# Altium PCB WPT_PLL_Transmitter.PcbDoc
Units mil, origin at the board's own origin, x right, y up, seen from the top; angles counter-clockwise.
Board outline 2100 x 1700 mil, 2 copper layers (Top Layer, Bottom Layer); 14 components, 21 nets, 56 pads, 3 vias.
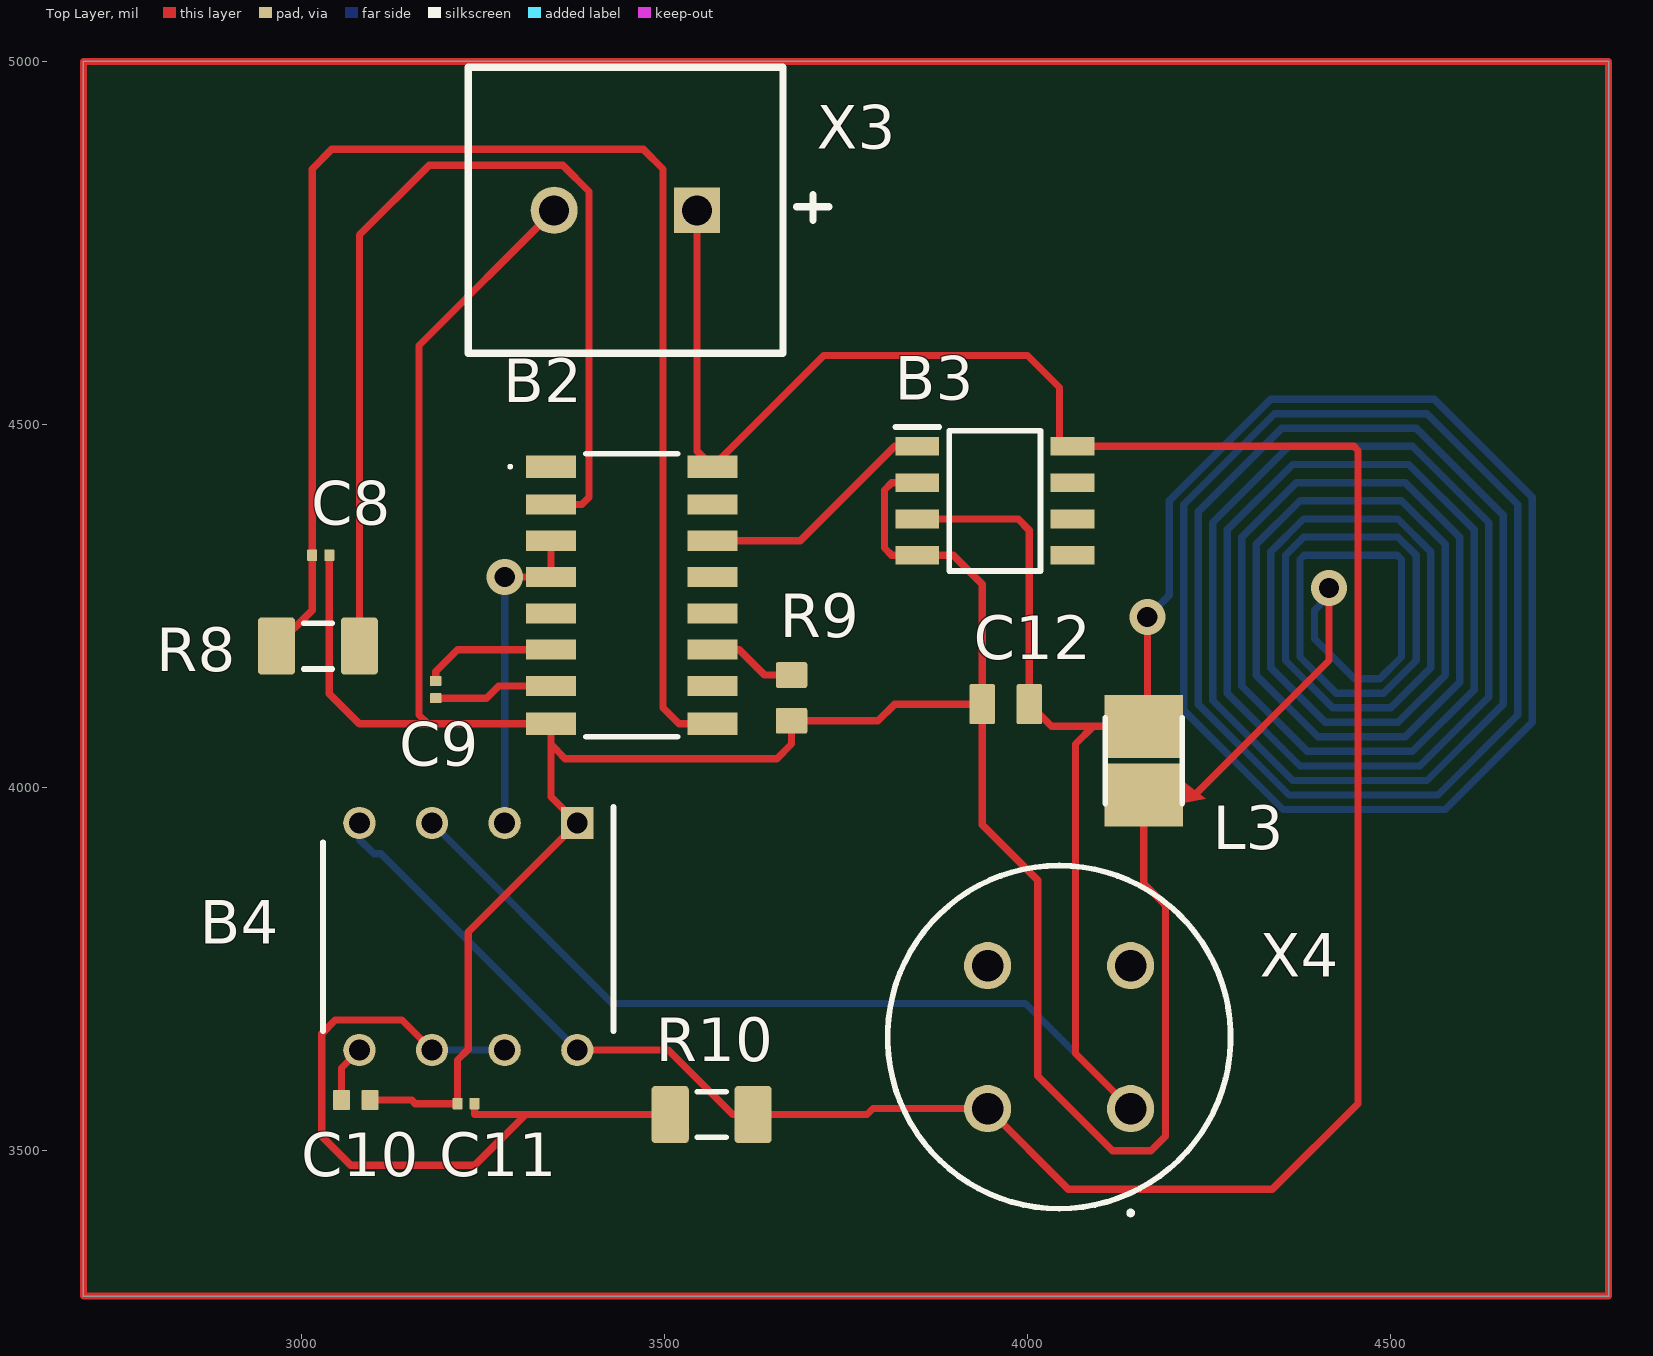
[diagram p0: Top Layer view]
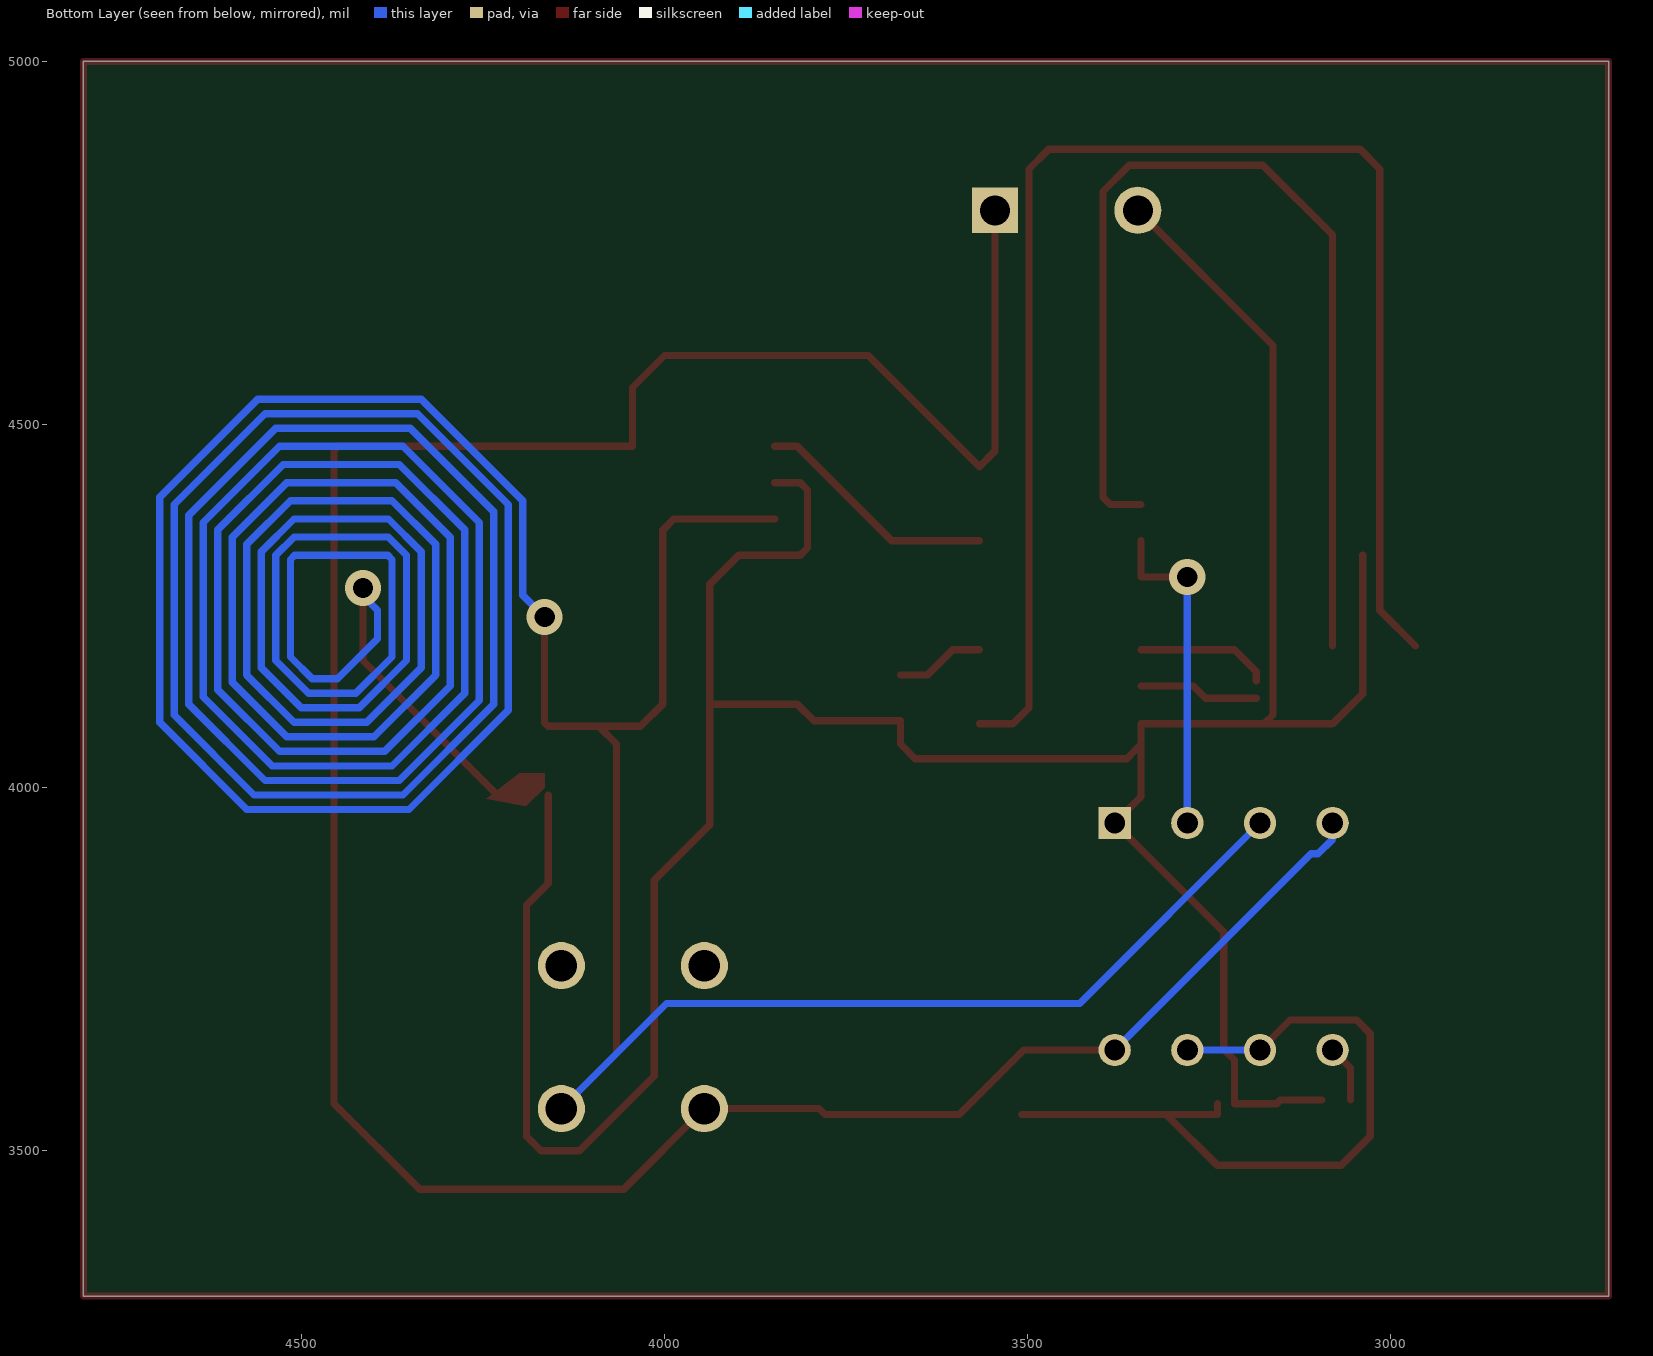
[diagram p1: Bottom Layer view, seen from below]
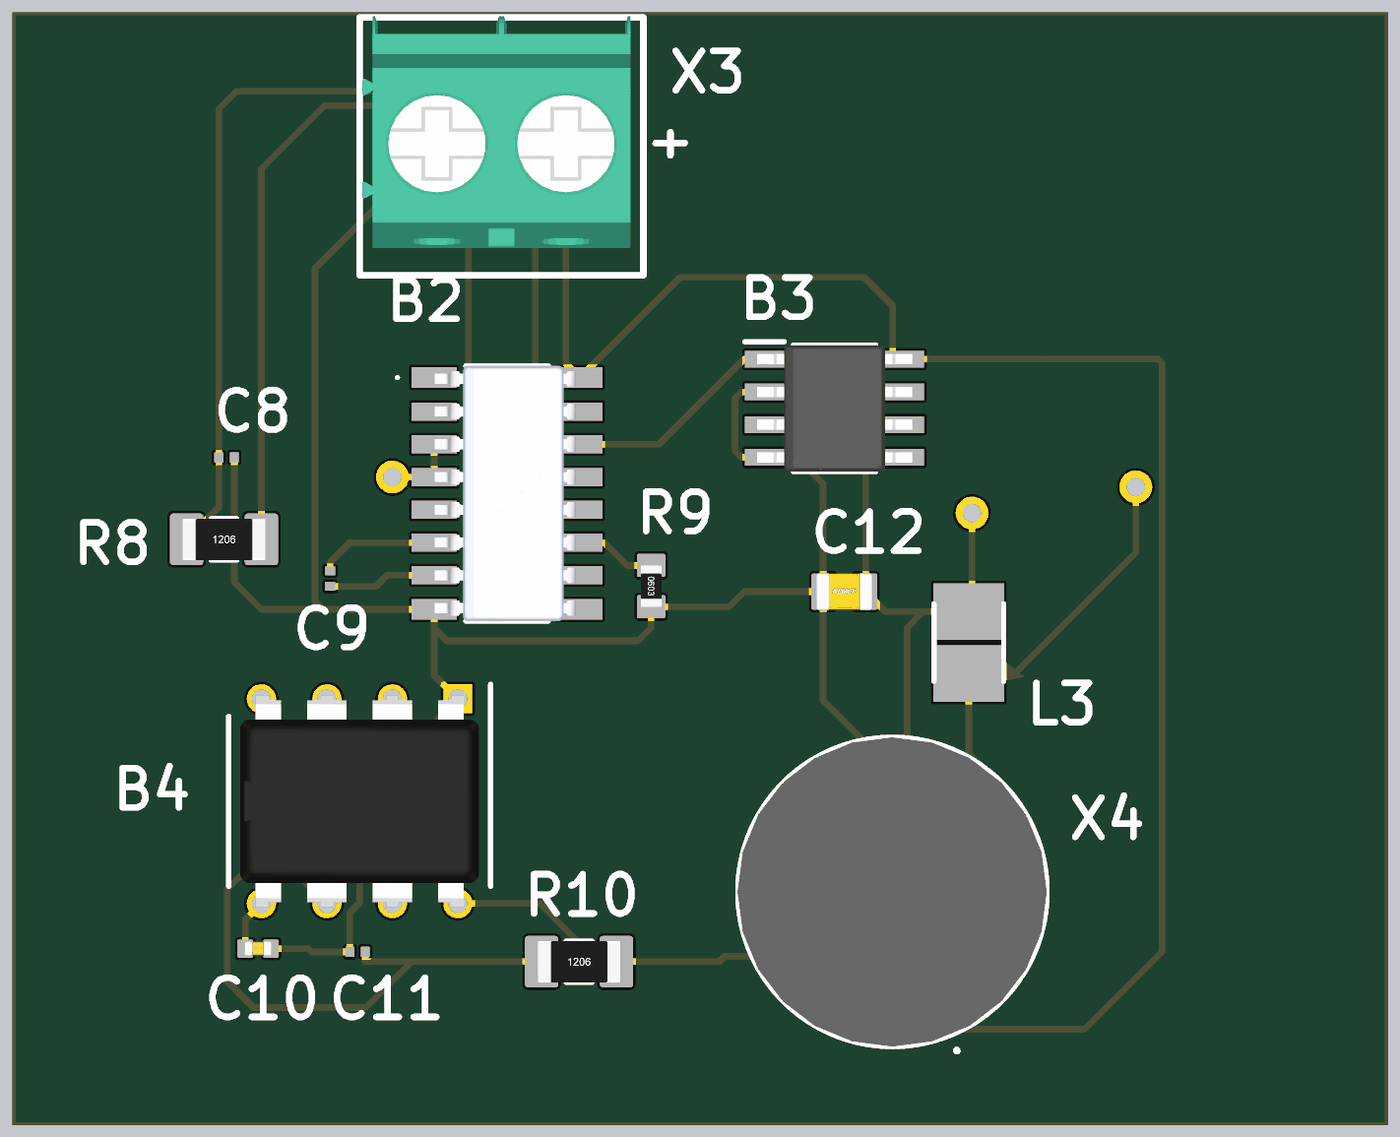
[diagram p2: 3D render of the assembled board from above, using the file's embedded part models]

## Layer stack, top to bottom
Top Solder: solder mask 0.4, Solder Resist, Dk 3.5
Top Layer: signal copper 1.4
Dielectric 1: dielectric 12.6, FR-4, Dk 4.8
Bottom Layer: signal copper 1.4
Bottom Solder: solder mask 0.4, Solder Resist, Dk 3.5

## Board outline
2700,3300 2700,5000 4800,5000 4800,3300

## Design rules (kind name [scope] priority, off if disabled: settings)
Clearance [All] p1: gap=10 ignorepadtopadclearanceinfootprint=FALSE except(0: Arc-Hole Track-Hole SMDPad-Hole THPad-Hole Via-Hole Fill-Hole Poly-Hole Region-Hole Text-Hole)
PolygonConnect [All] p1: connectstyle=Relief reliefconductorwidth=10 reliefentries=4 polygonreliefangle="90 Angle" airgapwidth=10
RoomDefinition WPT_PLL_Transmitter [InComponentClass('WPT_PLL_Transmitter')] p1: confinementstyle=ConfineIn formatcopy=TRUE lockcomponents=FALSE outline 6490,3010 5687.76,3010 5687.76,2210 6490,2210
RoutingVias [All] p1: holewidth=28 width=50 viastyle="Through Hole" minholewidth=28 minwidth=50 maxholewidth=28 maxwidth=50
SolderMaskExpansion [All] p1: expansion=4 istentingtop=FALSE
Width [All] p1: maxlimit=10 minlimit=10 preferedwidth=10
30 further rules are at their usual default settings.

## Classes and differential pairs
component class WPT_Transmitter: L1
component class WPT_.RecieverSchDoc: L2

## Components (designator, comment, footprint, x,y, rotation, side; value= is the part's Value field where it differs from the comment)
B2 "HEF4046BT_653" HEF4046BT653 3455,4265 r270 top
B3 "LM393DR" SOIC127P600X175-8N 3955,4395 r0 top
B4 "NE555P" DIP794W53P254L959H508Q8N 3230,3795 r270 top
C8 "CL03A104KQ3NNNC" CAP0201 3026.81,4320 r180 top value=0.1μF
C9 "GCM0335C1H101FA16D" CAP0201 3185,4135 r90 top value=100pF
C10 "KGM05AR71C103KH" CAP0402 3075,3570 r0 top value=0.01μF
C11 "GCM0335C1H101FA16D" CAP0201 3226.81,3565 r180 top value=100pF
C12 "CL21A106KOCLRNC" CAP0805 3970,4115 r0 top value=10μF
L3 "Custom Trace Inductor" "Custom Trace Inductor" 4160,4037.24 r90 top
R8 "RNCP1206FTD1K00" RES1206 3022.91,4195 r0 top value=1kΩ
R9 "RC0603FR-07100KL" RES0603 3675,4123.5 r270 top value=100kΩ
R10 "RNCP1206FTD1K00" RES1206 3565,3550 r0 top value=1kΩ
X3 "1934861" 1934861 3446.57,4795 r180 top
X4 "D6L90F1LFS" D6L90F1LFS 4141.85,3558.15 r90 top

## Footprints (in the part's own frame and the unit in brackets; to place one, negate y for a bottom-side part, rotate by r counter-clockwise, add the part's x,y. Pads: shape width x height; smd on the part's side, far side on the other; paste and mask are expansions set on the pad)
1934861 [mm]
  rect 1.6x1.6 hole 1.05 mask+0.05: 1(-2.5,0)
  round 1.65 hole 1.05 mask+0.05: 2(2.5,0)
  silkscreen extent -7.1,-5 5.5,5, body extent -5,-5.05 5.4,3.95, height 11.41
CAP0201 [mm] "Chip Capacitor, Body 0.6x0.3mm, Height 0.25mm, IPC Medium Density"
  rrect15% 0.35x0.4 smd: 1(-0.3,0) 2(0.3,0)
  body extent -0.3,-0.15 0.3,0.15, height 0.3
CAP0402 [mm] "Chip Capacitor, Body 1x0.5mm, Height 0.35mm, IPC Medium Density"
  rrect15% 0.6x0.7 smd: 1(-0.5,0) 2(0.5,0)
  body extent -0.53,-0.28 0.52,0.27, height 0.54
CAP0805 [mm] "Chip Capacitor, Body 2.0x1.2mm, Height 0.45mm, IPC Medium Density"
  rrect15% 0.9x1.4 smd: 1(-0.825,0) 2(0.825,0)
  body extent -1.1,-0.73 1.1,0.72, height 1.39
"Custom Trace Inductor" [mm]
  rect 2.2x2.75 smd: 1(-1.2,0) 2(1.2,0)
  silkscreen extent -1.5,-1.35 1.5,1.35
D6L90F1LFS [mm]
  round 1.65 hole 1.1: 1(0,0) 2(5,0) 3(5,5) 4(0,5)
  silkscreen extent -3.7,-3.5 8.5,8.5, body extent -3.5,-3.48 8.5,8.5, height 12.9
DIP794W53P254L959H508Q8N [mm]
  rect 1.13x1.13 / inner round 1.13 / far side rect 1.13x1.13 hole 0.73: 1(-3.97,3.81)
  round 1.13 hole 0.73: 2(-3.97,1.27) 3(-3.97,-1.27) 4(-3.97,-3.81) 5(3.97,-3.81) 6(3.97,-1.27) 7(3.97,1.27) 8(3.97,3.81)
  silkscreen extent -4.54,-5.08 3.3,5.08, body extent -4.1,-4.64 4.1,4.64, height 4.21
HEF4046BT653 [mm]
  rect 0.8x1.75 smd: 1(-4.495,-2.825) 8(4.495,-2.825) 9(4.495,2.825) 16(-4.495,2.825)
  rect 0.7x1.75 smd: 2(-3.175,-2.825) 3(-1.905,-2.825) 4(-0.635,-2.825) 5(0.635,-2.825) 6(1.905,-2.825) 7(3.175,-2.825) 10(3.175,2.825) 11(1.905,2.825) 12(0.635,2.825) 13(-0.635,2.825) 14(-1.905,2.825) 15(-3.175,2.825)
  silkscreen extent -4.95,-4.3 4.95,1.6, body extent -4.95,-2.82 4.95,3.27, height 1.56
RES0603 [mm] "Chip Resistor, Body 1.6x0.8mm, IPC Medium Density"
  rrect15% 0.9x1.1 smd: 1(-0.8,0) 2(0.8,0)
  body extent -0.8,-0.4 0.8,0.4, height 0.46
RES1206 [mm] "Chip Resistor, Body 3.2x1.6mm, IPC Medium Density"
  rrect20% 1.3x2 smd: 1(-1.45,0) 2(1.45,0)
  silkscreen extent -0.5,-0.8 0.5,0.8, body extent -1.6,-0.8 1.6,0.8, height 0.61
SOIC127P600X175-8N [mm]
  rect 1.528x0.65 smd: 1(-2.711,1.905) 2(-2.711,0.635) 3(-2.711,-0.635) 4(-2.711,-1.905) 5(2.711,-1.905) 6(2.711,-0.635) 7(2.711,0.635) 8(2.711,1.905)
  silkscreen extent -3.47,-2.45 1.6,2.58, body extent -3.01,-2.45 3.01,2.45, height 1.63

## Part data
B2: "HEF4046B - Phase-locked loop@en-us", Manufacturer_Name=Nexperia, Manufacturer_Part_Number=HEF4046BT,653, Mouser Part Number=771-HEF4046BTD-T, Datasheet Link=https://assets.nexperia.com/documents/data-sheet/HEF4046B.pdf, Geometry.Height=1.75mm, Mouser Price/Stock=https://www.mouser.co.uk/ProductDetail/Nexperia/HEF4046BT653?qs=me8TqzrmIYX2aTqHtDTTaw%3D%3D
B3: "LM393DR, Dual Comparator Open Collector 1.3us 12 V, 15 V, 18 V, 24 V, 28 V, 3 V, 5 V, 9 V 8-Pin SOIC", Manufacturer_Name="Texas Instruments", Mouser Part Number=595-LM393DR, Datasheet Link=https://www.ti.com/lit/ds/symlink/lm393.pdf?ts=1593083953253&ref_url=https%253A%252F%252Fwww.ti.com%252Fstore%252Fti%252Fen%252Fp%252Fproduct%252F%253Fp%253DLM393DR, Geometry.Height=1.75mm, Manufacturer_Part_Number=LM393DR, Mouser Price/Stock=https://www.mouser.co.uk/ProductDetail/Texas-Instruments/LM393DR?qs=8k%2FZSzWMuCP%2FrtMSX0i7pQ%3D%3D
B4: library part NE555P_1, "Precision timer,NE555P 0.5MHz DIL8 Texas Instruments NE555P, Precision Timer, 4.5  16 V, 8-Pin PDIP", Manufacturer_Name="Texas Instruments", Mouser Part Number=595-NE555P, Datasheet Link=http://www.ti.com/lit/ds/symlink/ne555.pdf, Geometry.Height=5.08mm, Manufacturer_Part_Number=NE555P, Mouser Price/Stock=https://www.mouser.co.uk/ProductDetail/Texas-Instruments/NE555P?qs=rkhjVJ6%2F3EIf4CWgjIKuKQ%3D%3D
C8: "CAP CER 0.1UF 6.3V X5R 0201", Manufacturer 1="Samsung Electro-Mechanics", Supplier Part Number 1=1276-1013-2-ND, Voltage Rating=6.3V, Manufacturer Part Number 1=CL03A104KQ3NNNC, Supplier 1=Digi-Key
C9 C11: "CAP CER 100PF 50V C0G/NP0 0201", Manufacturer 1=Murata, Supplier Part Number 1=490-GCM0335C1H101FA16DTR-ND, Voltage Rating=50V, Manufacturer Part Number 1=GCM0335C1H101FA16D, Supplier 1=Digi-Key
C10: "CAP CER 10000PF 16V X7R 0402", Manufacturer 1="KYOCERA AVX", Supplier Part Number 1=478-KGM05AR71C103KHTR-ND, Voltage Rating=16V, Manufacturer Part Number 1=KGM05AR71C103KH, Supplier 1=Digi-Key
C12: "CAP CER 10UF 16V X5R 0805", Manufacturer 1="Samsung Electro-Mechanics", Supplier Part Number 1=1276-2399-2-ND, Voltage Rating=16V, Manufacturer Part Number 1=CL21A106KOCLRNC, Supplier 1=Digi-Key
L3: Manufacturer_Name=Bourns, Manufacturer_Part_Number=SRN3015-2R2M, Mouser Part Number=652-SRN3015-2R2M, Geometry.Height=1.5mm, Mouser Price/Stock=https://www.mouser.co.uk/ProductDetail/Bourns/SRN3015-2R2M?qs=opBjA1TV9012ipbB8adgog%3D%3D
R8 R10: "RES 1K OHM 1% 1/2W 1206", Manufacturer 1="Stackpole Electronics Inc", Power Rating=1/2W, Supplier Part Number 1=RNCP1206FTD1K00TR-ND, Manufacturer Part Number 1=RNCP1206FTD1K00, Supplier 1=Digi-Key
R9: "RES 100K OHM 1% 1/10W 0603", Manufacturer 1=Yageo, Power Rating=1/10W, Supplier Part Number 1=311-100KHRTR-ND, Manufacturer Part Number 1=RC0603FR-07100KL, Supplier 1=Digi-Key
X4: "Pushbutton Switches Key Switch N.O. SPDT 100 mA", Manufacturer_Name="C & K COMPONENTS", Mouser Part Number=611-D6L90F1LFS, Datasheet Link=https://componentsearchengine.com/Datasheets/2/D6L90F1LFS.pdf, Geometry.Height=12.8mm, Manufacturer_Part_Number=D6L90F1LFS, Mouser Price/Stock=https://www.mouser.co.uk/ProductDetail/CK/D6L90F1LFS?qs=sb%252But3Lm4x0dNacvZI6mbQ%3D%3D

## Via types
v1: diameter 50, hole 28, Top Layer to Bottom Layer, 3 vias

## Nets (pads, with @x,y where several pads share a name; then routed paths per layer and width w, separated by ;. In a path a pad name is that pad's centre, name@x,y a point inside that pad or via, vN(x,y) a via of type N, cw(c..) or ccw(c..) an arc to the next point about the centre after c; other vN are vias at no path point)
+5: B2.16 B3.8 B4.4 B4.8 R10.2 X3.1 X4.4 | length 3967.4
  Top Layer w10: B4.8 3505.3,3638.7 3594,3550 R10.2 3779,3550 3787.15,3558.15 X4.4 4056.15,3447 4337,3447 4455,3565 4455,4464.14 4449.14,4470 4044,4470 4044,4551 4000,4595 3719.25,4595 B2.16 3545,4463.19 X3.1
  Bottom Layer w10: B4.4 3080,3929 3100,3909 3109.7,3909 B4.8
GND: B2.8 B3.2 B3.4 B4.1 C8.1 C10.2 C11.2 C12.1 L3.1 R9.2 X3.2 | length 4385.5
  Top Layer w10: C8.1 3038.62,4129.41 3080,4088.03 3173.97,4088.03 ; C10.2 3152,3570 3157,3565 C11.2 3215,3625 3230,3640 3230,3801.3 B4.1 3343.78,3987.52 3343.78,4060 ; X3.2 3162,4608.85 3162,4100 3173.97,4088.03 ; B3.2 3813,4420 3803,4410 3803,4330 3813,4320 B3.4 3897.52,4320 3937.52,4280 C12.1 ; L3.1 4160,3868 4190,3838 4190,3520 4170,3500 4117,3500 4014,3603 4014,3872.52 3937.52,3949 C12.1 ; 3173.97,4088.03 B2.8 3343.78,4060 ; 3343.78,4060 3363,4040 3655,4040 3675,4060 R9.2 3794,4092.01 3816.99,4115 C12.1
NetB1_2: 
NetB1_3: 
NetB1_7: 
NetB2_2: B2.2 R8.2 | length 1414
  Top Layer w10: R8.2 3080,4761 3176,4857 3360,4857 3396,4821 3396,4400 3386,4390 B2.2
NetB2_3: B2.3 B2.4 B4.2 | length 452.5
  Top Layer w10: v1(3280,4290) B2.4 B2.3
  Bottom Layer w10: B4.2 v1(3280,4290)
NetB2_6: B2.6 C9.2 | length 184.4
  Top Layer w10: C9.2 3185,4160 3215,4190 B2.6
NetB2_7: B2.7 C9.1 | length 165.7
  Top Layer w10: C9.1 3255,4123.19 3271.81,4140 B2.7
NetB2_9: B2.9 C8.2 R8.1 | length 2002
  Top Layer w10: R8.1 3015,4244.17 C8.2 3015,4852 3042,4879 3471,4879 3498,4852 3498,4110.03 3520,4088.03 B2.9
NetB2_11: B2.11 R9.1 | length 123.3
  Top Layer w10: B2.11 3603,4190 3638,4155 R9.1
NetB2_14: B2.14 B3.1 | length 335.9
  Top Layer w10: B2.14 3687,4340 3817,4470 B3.1
NetB3_3: B3.3 B4.3 C12.2 L3.2 X4.1 | length 14554.9
  Top Layer w10: B3.3 3987,4370 4002.48,4354.52 C12.2 4032.99,4084.49 4090.49,4084.49 ; X4.1 4066,3634 4066,4060 4090.49,4084.49 ; v1(4165,4235) 4165,4089.49 L3.2 4090.49,4084.49 ; 4230,3990 4415,4175 v1(4415,4275)
  Bottom Layer w10: B4.3 3428.3,3703 3997,3703 X4.1 ; v1(4165,4235) 4195,4265 4195,4395 4335,4535 4560,4535 4695,4400 4695,4090 4575,3970 4351.72,3970 4215,4106.72 4215,4390 4340,4515 4550,4515 4675,4390 4675,4100 4565,3990 4360,3990 4235,4115 4235,4380 4350,4495 4535,4495 4655,4375 4655,4115 4550,4010 4365,4010 4255,4120 4255,4365 4360,4470 4530,4470 4635,4365 4635,4125 4540,4030 4375,4030 4275,4130 4275,4355 4365,4445 4525,4445 4615,4355 4615,4135 4530,4050 4385,4050 4295,4140 4295,4345 4370,4420 4520,4420 4595,4345 4595,4145 4520,4070 4400,4070 4315,4155 4315,4335 4375,4395 4515,4395 4575,4335 4575,4155 4510,4090 4410,4090 4335,4165 4335,4325 4380,4370 4510,4370 4555,4325 4555,4165 4500,4110 4420,4110 4355,4175 4355,4320 4380,4345 4510,4345 4535,4320 4535,4175 4490,4130 4425,4130 4375,4180 4375,4314.14 4380.86,4320 4509.14,4320 4515,4314.14 4515,4180 4485,4150 4450,4150 4395,4205 4395,4244.18 4415,4264.18 v1(4415,4275)
NetB4_5: B4.5 C10.1 | length 78.9
  Top Layer w10: C10.1 3055.32,3614.02 B4.5
NetB4_6: B4.6 B4.7 C11.1 R10.1 | length 1029
  Top Layer w10: B4.6 3138.7,3680 3046.7,3680 3028,3661.3 3028,3520 3068,3480 3239,3480 3309,3550 ; C11.1 3238.62,3550 3309,3550 ; R10.1 3309,3550
  Bottom Layer w10: B4.6 B4.7
NetC2_2: 
NetC4_1: 
NetC4_2: 
NetC5_2: 
NetLED1_2: 
NetQ1_3: 
pads on no net: B2.1 B2.5 B2.10 B2.12 B2.13 B2.15 B3.5 B3.6 B3.7 X4.2 X4.3
copper on no net: | length 7600
  Top Layer w10: 2700,3300 2700,5000 4800,5000 4800,3300 2700,3300

## Other copper
Top Layer:
  region net GND: 4245,3985 4200,4020 4165,4020 4165,4000 4190,3975 4195,3975